# EAGLE board NixiePower_panelize (EAGLE 7.1.0)
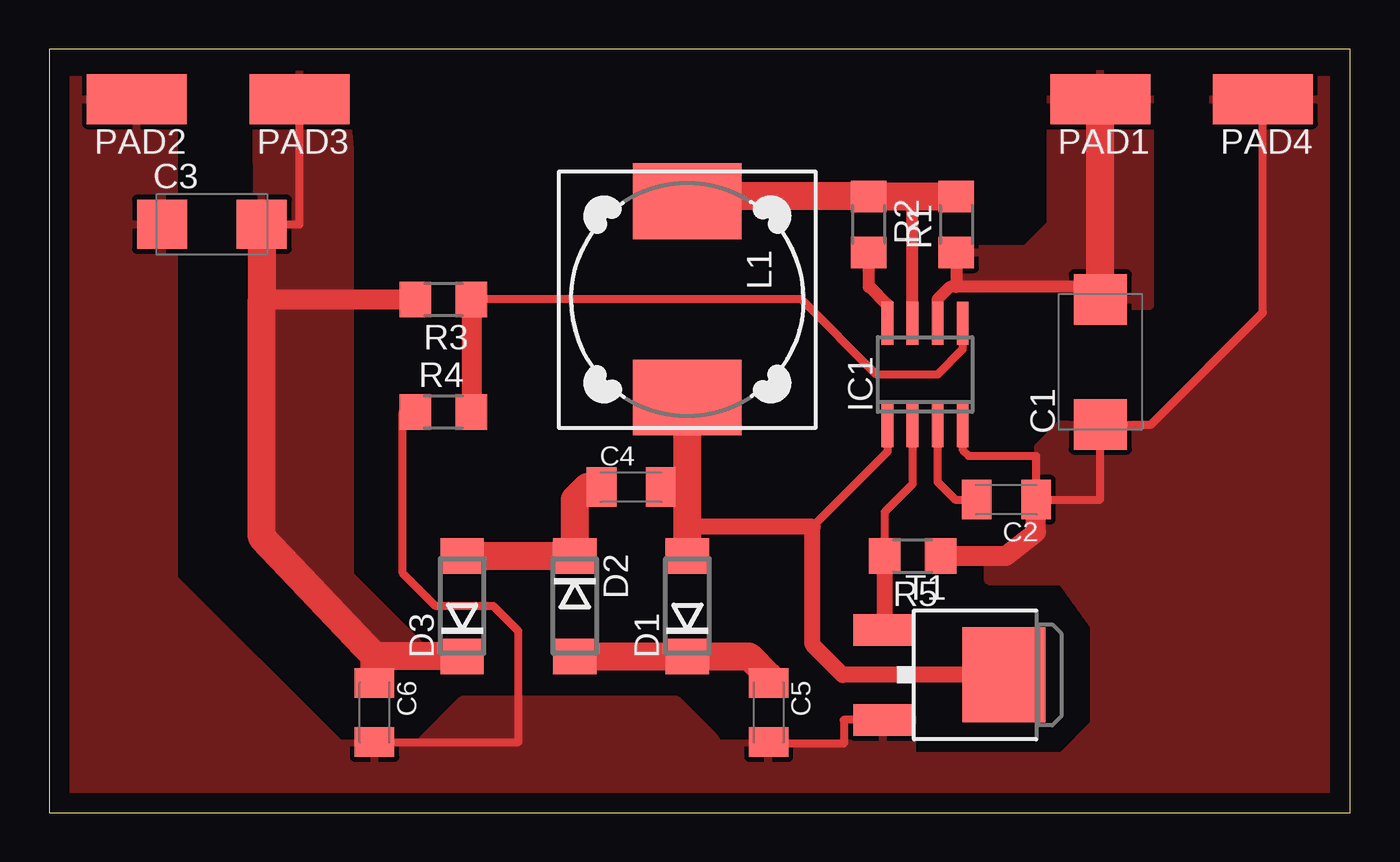
[diagram p0: board, top side]

Size 66.03 x 38.73 mm. Coordinates in mm from the lower left corner, seen from the top.
Outline: 0,0 66.03,0 66.03,38.73 0,38.73 0,0
Copper layers (1*16): Top 0.035mm / dielectric 1.5mm / Bottom 0.035mm
Design rules "default": minimum track width 10mil, minimum drill 24mil, track to track 8mil, track to pad 8mil, pad to pad 8mil, via to via 8mil, smd to smd 8mil, copper to edge 40mil, drill to drill 8mil, minimum pad ring 10mil, minimum via ring 8mil, stop-mask expansion 4mil, vias tented up to drill 0mil, thermal gap 10mil

## Footprints (pad centres in the part's own frame; a part is rotated, then mirrored left to right if it is on the bottom)
D/7343-31R = smd 2.55 x 2.7: + 3.175,0; - -3.175,0
C1206K = smd 1.5 x 2: 1 -1.5,0; 2 1.5,0
C/6032-28R = smd 2.55 x 2.5: + 2.525,0; - -2.525,0
DO214AA = smd 1.8 x 2.2: A 2.55,0; C -2.55,0
SOIC8 = smd 0.6 x 2.2: 1 -1.905,-2.6; 2 -0.635,-2.6; 3 0.635,-2.6; 4 1.905,-2.6; 5 1.905,2.6; 6 0.635,2.6; 7 -0.635,2.6; 8 -1.905,2.6
DR125 = smd 3.85 x 5.5: 1 -4.975,0; 2 4.975,0
SMD2,54-5,08 = smd 2.54 x 5.08: 1 0,0
R1206 = smd 1.6 x 1.803: 1 -1.422,0; 2 1.422,0
DPAK = smd 1.6 x 3: 1 -2.28,-4.04; 3 2.28,-4.04 | smd 4.826 x 4.191: 4 0,2.096

## Placement (x,y rotation side)
C1  100uF  [D/7343-31R]  53.34,22.86 90 top
C2  400pF  [C1206K]  48.58,15.88 180 top
C3  40uF  [C/6032-28R]  8.26,29.84 0 top
C4  470nF  [C1206K]  29.53,16.51 0 top
C5  470nF  [C1206K]  36.51,5.08 270 top
C6  470nF  [C1206K]  16.51,5.08 270 top
D1  MURS120  [DO214AA]  32.38,10.48 90 top
D2  MURS120  [DO214AA]  26.67,10.48 270 top
D3  MURS120  [DO214AA]  20.95,10.48 90 top
IC1  MC34063AD  [SOIC8]  44.45,22.23 0 top
L1  DR125  [DR125]  32.38,26.04 270 top
PAD1  [SMD2,54-5,08]  53.34,36.2 90 top
PAD2  [SMD2,54-5,08]  4.45,36.2 90 top
PAD3  [SMD2,54-5,08]  12.7,36.2 90 top
PAD4  [SMD2,54-5,08]  61.59,36.2 90 top
R1  0.5  [R1206]  46.04,29.84 90 top
R2  180  [R1206]  41.59,29.84 270 top
R3  47k  [R1206]  20,26.04 180 top
R4  2.2k  [R1206]  20,20.32 0 top
R5  [R1206]  43.81,13.02 180 top
T1  MJD31  [DPAK]  46.35,6.99 270 top

## Library data of the parts
C1-C6 = rcl
D1-D3 = diode
IC1 = mc34063
L1 = inductors
PAD1-PAD4 = wirepad
R1-R5 = rcl-2
T1 = transistor

## Nets
GND: C1.- C2.1 C3.- C5.2 C6.2 IC1.4 PAD2.1 PAD4.1 R4.1 R5.1 T1.3
N$1: C4.2 D1.A IC1.1 L1.2 T1.4
N$2: C2.2 IC1.3
N$3: IC1.7 L1.1 R1.2 R2.1
N$4: IC1.8 R2.2
N$5: C1.+ IC1.6 PAD1.1 R1.1
N$7: IC1.5 R3.1 R4.2
N$8: C5.1 D1.C D2.A
N$9: C4.1 D2.C D3.A
N$10: C3.+ C6.1 D3.C PAD3.1 R3.2
N$11: IC1.2 R5.2 T1.1

## Tracks (layer width: path | path; a pad name or v marks a point on that pad's centre or on a via)
GND
  Top 0.406: 53.34,19.62 C1.- | C1.- 55.91,19.68 61.59,25.36 PAD4.1 | C6.2 23.81,3.58 23.81,9.21 22.54,10.48 19.61,10.48 17.95,12.14 17.95,20.32 R4.1 | T1.3 40.32,4.71 40.32,3.49 36.51,3.49 C5.2 | C1.- 53.34,15.88 C2.1 50.08,18.1 46.67,18.1 46.35,18.41 IC1.4
  Top 1.016: R5.1 48.55,13.02 50.08,14.23 C2.1
  pour Top: 6.35,37.15 0,37.15 0,0 66.04,0 66.04,37.15 59.05,37.15 59.05,34.92 61.59,34.92 61.59,25.4 55.88,19.68 51.33,19.68 50.16,18.52 50.16,14.61 47.62,12.7 47.62,11.82 47.7,11.75 51.38,11.75 53.02,9.47 53.02,4.5 51.38,2.86 43.81,2.86 43.81,5.08 40.96,5.08 40.96,3.49 33.97,3.49 33.66,3.92 31.86,5.71 20.95,5.71 18.73,3.49 14.73,3.49 6.35,11.87
N$1
  Top 0.406: IC1.1 42.55,18.31 38.73,14.5 | 32.38,14.5 32.38,14.61
  Top 0.813: T1.4 40.27,6.99 38.73,8.52 38.73,14.5 32.38,14.5
  Top 1.422: D1.A 32.38,14.61 32.38,16.51 | 32.38,16.51 L1.2 | C4.2 32.38,16.51
N$2
  Top 0.406: IC1.3 45.09,16.77 45.98,15.88 C2.2
N$3
  Top 0.406: 32.38,31.27 L1.1
  Top 0.61: IC1.7 43.81,31.27
  Top 1.422: R1.2 43.81,31.27 R2.1 32.38,31.27
N$4
  Top 0.61: IC1.8 42.55,25.77 41.65,26.67 41.59,26.67 R2.2
N$5
  Top 0.406: C1.+ 53.34,26.67
  Top 0.61: R1.1 46.04,26.67 | 46.04,26.67 45.72,26.67 45.09,26.04 IC1.6 | 53.34,26.67 46.04,26.67
  Top 1.422: 53.34,26.67 PAD1.1
  pour Top: 46.35,26.67 54.61,26.67 54.61,25.72 55.88,25.72 55.88,37.47 50.8,37.47 50.8,29.84 49.53,28.57 46.35,28.57
N$7
  Top 0.406: IC1.5 46.35,23.5 45.09,22.23 41.99,22.23 38.18,26.04 R3.1
  Top 1.016: R3.1 R4.2
N$8
  Top 1.422: D2.A D1.C 35.51,7.93 36.51,6.93 C5.1
N$9
  Top 1.422: C4.1 27.3,16.51 26.67,15.88 D2.C D3.A
N$10
  Top 0.406: C3.+ 12.7,29.84 PAD3.1
  Top 1.016: 10.78,26.04 R3.2
  Top 1.422: C3.+ 10.78,26.04 10.78,13.97 16.51,7.93 | D3.C 16.51,7.93 | C6.1 16.51,7.93
  pour Top: 10.48,37.47 14.92,37.47 15.24,33.66 15.24,12.06 19.68,7.62 16.51,7.62 10.79,13.97
N$11
  Top 0.406: IC1.2 43.81,16.66 42.39,15.24 R5.2 | 42.39,9.27 T1.1
  Top 0.813: R5.2 42.39,9.27